# Altium PCB PCB_Proxxon_PWM_v1.1.PcbDoc
Units mm, origin at the board's own origin, x right, y up, seen from the top; angles counter-clockwise.
Board outline 55 x 30.2 mm, 2 copper layers (Top Layer, Bottom Layer); 29 components, 26 nets, 120 pads, 4 vias.
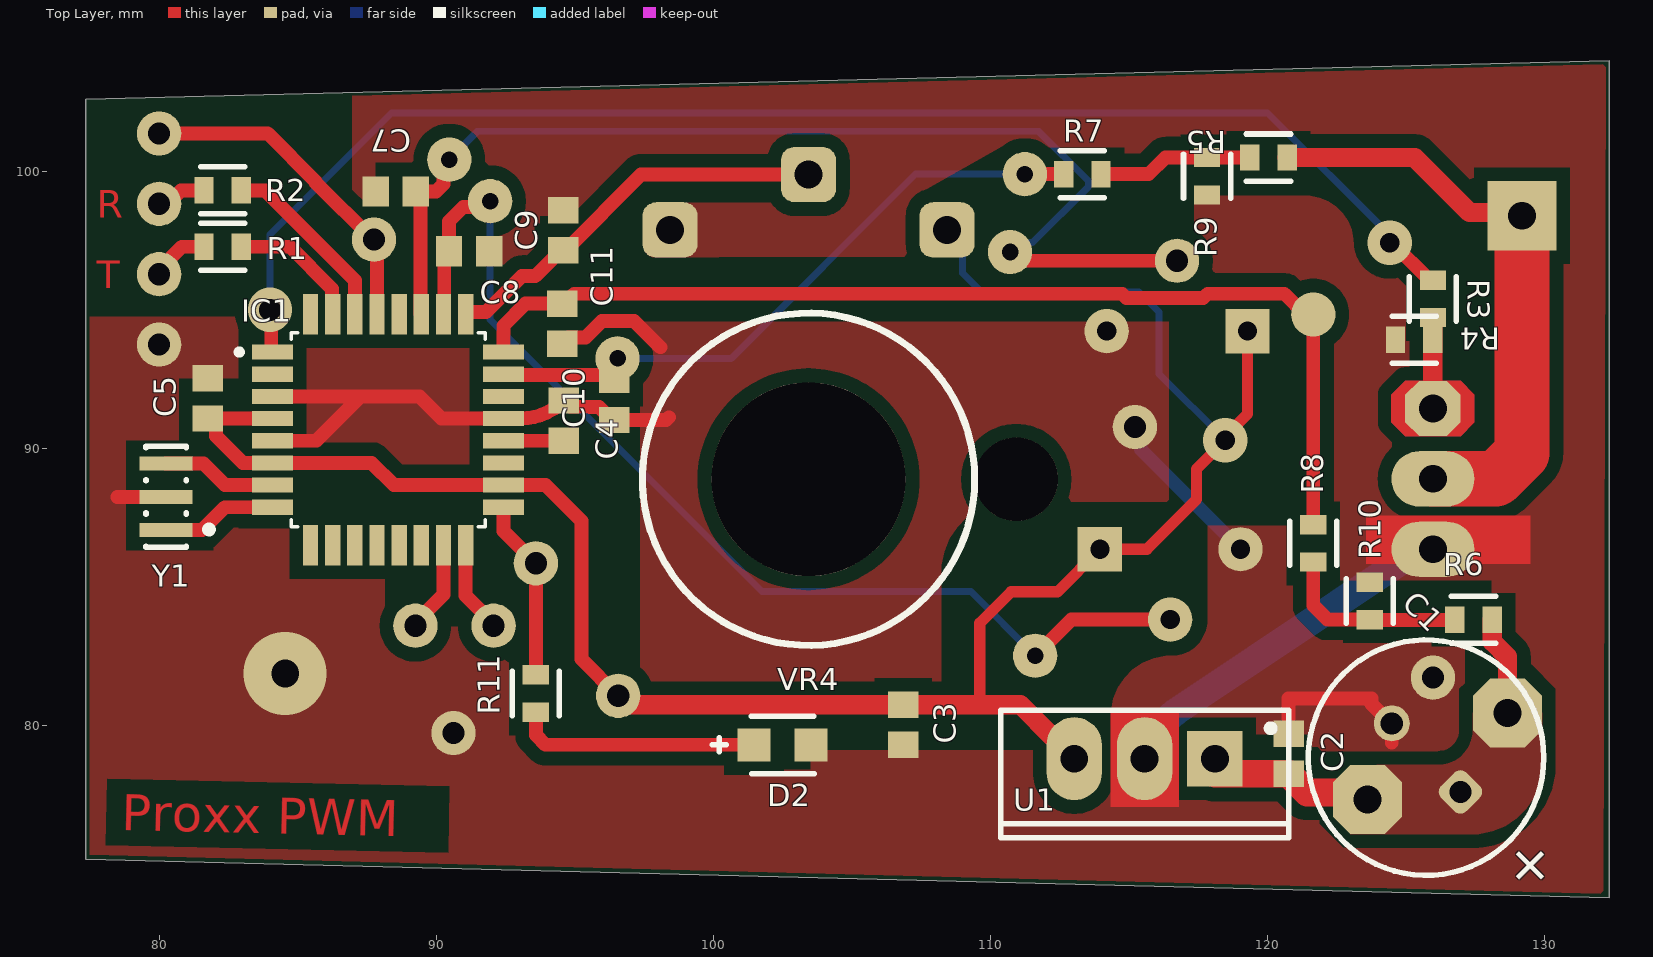
[diagram p0: Top Layer view]
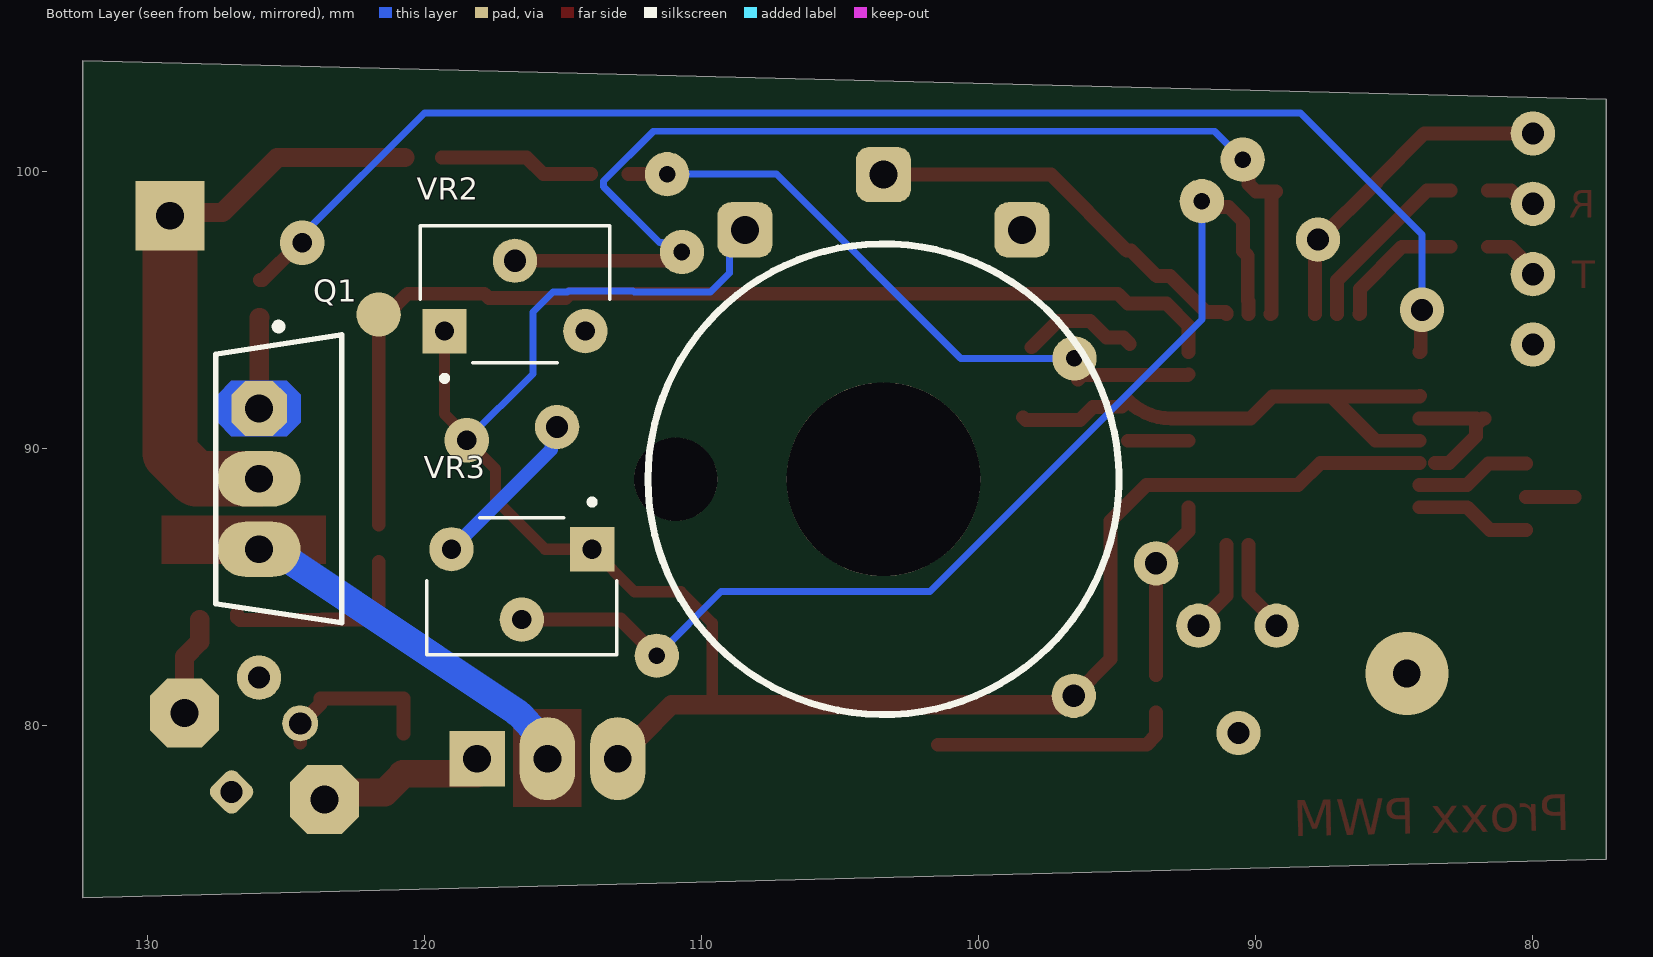
[diagram p1: Bottom Layer view, seen from below]
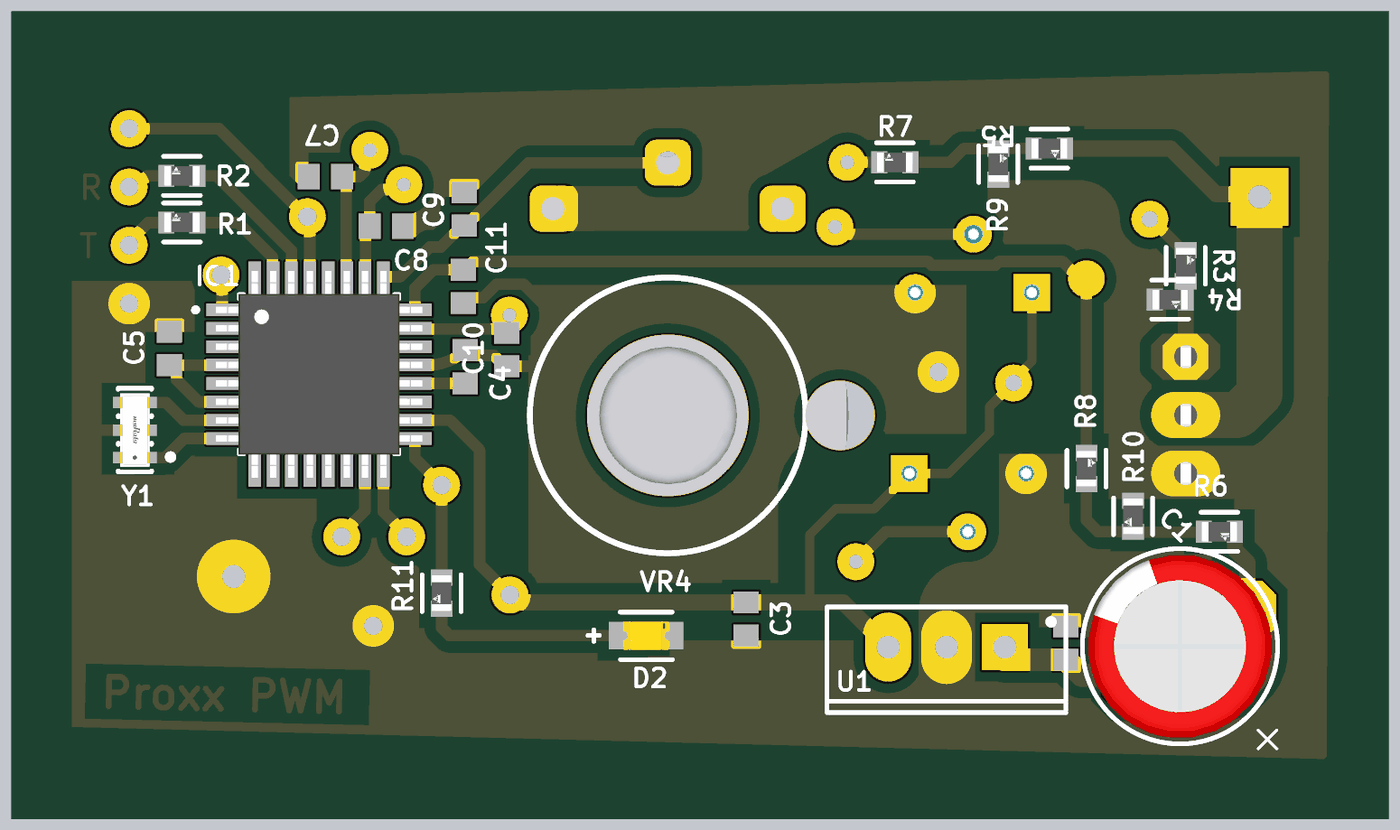
[diagram p2: 3D render of the assembled board from above, using the file's embedded part models]
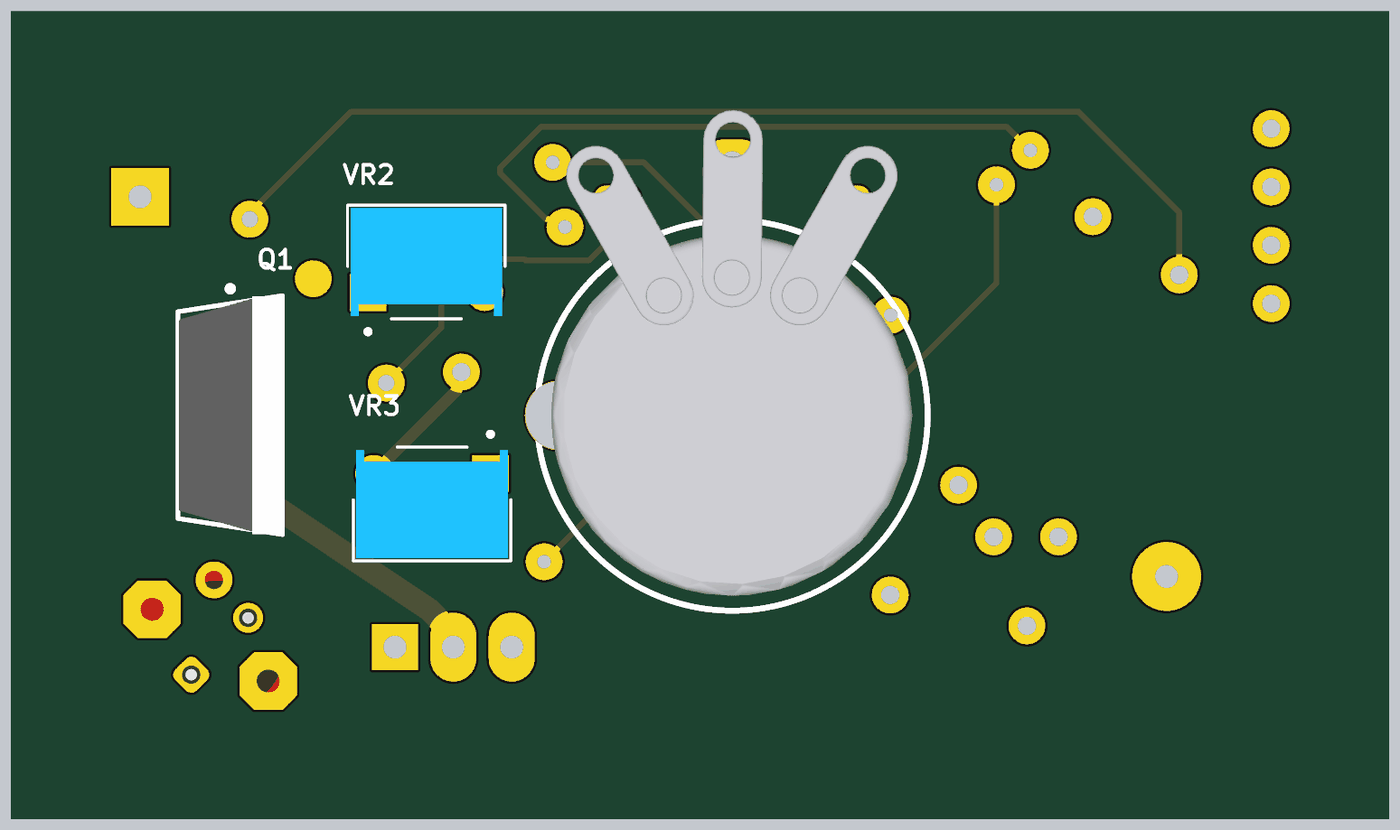
[diagram p3: 3D render of the assembled board from below, using the file's embedded part models]

## Layer stack, top to bottom
Top Solder: solder mask 0.0102, Solder Resist, Dk 3.5
Top Layer: signal copper 0.0356
Dielectric 1: dielectric 0.32, FR-4, Dk 4.8
Bottom Layer: signal copper 0.0356
Bottom Solder: solder mask 0.0102, Solder Resist, Dk 3.5

## Board outline
77.343,75.162 132.342,73.787 132.342,103.987 77.343,102.612

## Design rules (kind name [scope] priority, off if disabled: settings)
Clearance poly [IsRegion vs NOT IsText] p1: gap=0.5 ignorepadtopadclearanceinfootprint=FALSE
Clearance [All] p2: gap=0.3 ignorepadtopadclearanceinfootprint=FALSE except(0.1: Arc-SMDPad Track-SMDPad SMDPad-SMDPad Region-Text; 0.5: Track-Poly)
PlaneClearance [All] p1: clearance=0.6
PlaneConnect [All] p1: planeconnectstyle=Direct reliefexpansion=0.508 reliefentries=4 reliefconductorwidth=0.4 reliefairgap=0.254
PolygonConnect [All] p1: connectstyle=Direct reliefconductorwidth=0.5 reliefentries=4 polygonreliefangle="90 Angle" airgapwidth=0.254
RoutingVias [All] p1: holewidth=0.711 width=1.27 viastyle="Through Hole" minholewidth=0.711 minwidth=1.27 maxholewidth=0.711 maxwidth=1.27
SolderMaskExpansion [All] p1: expansion=0.102 istentingtop=FALSE
SupplyNets "Schematic Supply Nets_4" [InNet('+20V')] p1: voltage=0.000
SupplyNets "Schematic Supply Nets_2" [InNet('5V')] p2: voltage=0.000
SupplyNets "Schematic Supply Nets_1" [InNet('GND')] p3: voltage=0.000
SupplyNets "Schematic Supply Nets" [InNet('Vin')] p4: voltage=0.000
Width [All] p1: maxlimit=3 minlimit=0.15 preferedwidth=0.254
28 further rules are at their usual default settings.

## Components (designator, comment, footprint, x,y, rotation, side; value= is the part's Value field where it differs from the comment)
C1 "100uF" WCAP-ATLL_D8H11.5 125.738,78.837 r315 top
C2 "0.1uF" CAPC1608X92X38ML15T08 120.775,78.975 r270 top
C3 "0.1uF" CAPC1608X92X38ML15T08 106.857,80.025 r90 top
C4 "100nF" CAPC1608X92X38ML15T08 94.615,91.003 r90 top
C5 "1uF" CAPC1608X92X38ML15T08 81.75,91.803 r270 top
C7 "0.1uF" CAPC1608X92X38ML15T08 88.54,99.275 r0 top
C8 "0.1uF" CAPC1608X92X38ML15T08 91.19,97.125 r180 top
C9 "0.1uF" CAPC1608X92X38ML15T08 94.587,97.875 r270 top
C10 "0.1uF" CAPC1608X92X38ML15T08 96.425,91.753 r90 top
C11 "0.1uF" CAPC1608X92X38ML15T08 94.55,94.5 r90 top
D2 "SM0805YCL" FP-SM0805YCL-MFG 102.5,79.3 r0 top
IC1 "ATMEGA328PB-AU" QFP80P900X900X120-32N 88.265,90.678 r0 top
Q1 "IRLZ44" FP-PG-TO220-3-MFG 125.279,88.9 r180 bottom
R1 "1k" FP-MCT0603-MFG 82.296,97.282 r180 top
R2 "1k" FP-MCT0603-MFG 82.296,99.314 r180 top
R3 "100" FP-MCT0603-MFG 125.984,95.4 r90 top
R4 "10k" FP-MCT0603-MFG 125.309,93.925 r0 top
R5 "10k" FP-MCT0603-MFG 120.05,100.5 r0 top
R6 "10k" FP-MCT0603-MFG 127.45,83.82 r0 top
R7 "10k" FP-MCT0603-MFG 113.325,99.9 r180 top
R8 "10k" FP-MCT0603-MFG 121.666,86.574 r90 top
R9 "2k7" FP-MCT0603-MFG 117.83,99.825 r90 top
R10 "2k7" FP-MCT0603-MFG 123.698,84.495 r270 top
R11 "1k" FP-MCT0603-MFG 93.599,81.15 r270 top
U1 "L7805ABV" TO220 115.575,78.8 r180 top
VR2 "KI" TRIM_3362W-1-203LF#1 116.748,95.504 r0 bottom value=1k
VR3 "KP" TRIM_3362W-1-203LF#2 116.5,85.09 r180 bottom value=1k
VR4 "Speed" "Res-var - COMPACT" 103.443,88.887 r0 top value=92k
Y1 "CSTNE20M0VH3C000R0" FP-CSTNE20M0VH3C000R0-MFG 80.25,88.25 r90 top

## Footprints (in the part's own frame and the unit in brackets; to place one, negate y for a bottom-side part, rotate by r counter-clockwise, add the part's x,y. Pads: shape width x height; smd on the part's side, far side on the other; paste and mask are expansions set on the pad)
CAPC1608X92X38ML15T08 [mm] "Chip Capacitor, 2-Leads, Body 1.60x0.80mm, IPC Low Density"
  rect 0.95x1.1 smd: 1(-0.725,0) 2(0.725,0)
  body extent -0.87,-0.48 0.87,0.47, height 0.92
FP-CSTNE20M0VH3C000R0-MFG [mm]
  rect 0.5x1.9 smd paste+0 mask+0: 1(-1.2,0) 2(0,0) 3(1.2,0)
  silkscreen extent -1.83,-1.68 1.83,0.72, body extent -1.78,-1.05 1.78,1.05, height 0.25
FP-MCT0603-MFG [mm]
  rect 0.7x0.95 smd paste+0 mask+0: 1(-0.675,0) 2(0.675,0)
  silkscreen extent -0.8,-0.85 0.8,0.85, body extent -1.12,-0.58 1.12,0.58, height 0.25
FP-PG-TO220-3-MFG [mm]
  oct 2x2 hole 1 paste-2539.97 mask+0: 1(-0.705,2.54)
  oval 3x2 hole 1 paste-2539.97 mask+0: 2(-0.705,0) 3(-0.705,-2.54)
  Top Layer region: -1.705,3.54 -2.205,3.04 -2.205,2.04 -1.705,1.54 0.295,1.54 0.795,2.04 0.795,3.04 0.295,3.54
  Bottom Layer region: -1.705,3.54 -2.205,3.04 -2.205,2.04 -1.705,1.54 0.295,1.54 0.795,2.04 0.795,3.04 0.295,3.54
  silkscreen extent -2.27,-5.2 2.27,5.62, body extent -2.23,-5.18 2.22,5.18, height 19.15
FP-SM0805YCL-MFG [mil]
  rect 47x47 smd paste+0 mask+0: 1(-40.5,0) 2(40.5,0)
  silkscreen extent -100,-41 45,40, body extent -68,-33 68,33, height 10
QFP80P900X900X120-32N [mm]
  rect 1.47x0.55 smd paste+0 mask+0.102: 1(-4.17,2.8) 2(-4.17,2) 3(-4.17,1.2) 4(-4.17,0.4) 5(-4.17,-0.4) 6(-4.17,-1.2) 7(-4.17,-2) 8(-4.17,-2.8) 17(4.17,-2.8) 18(4.17,-2) 19(4.17,-1.2) 20(4.17,-0.4) 21(4.17,0.4) 22(4.17,1.2) 23(4.17,2) 24(4.17,2.8)
  rect 0.55x1.47 smd paste+0 mask+0.102: 9(-2.8,-4.17) 10(-2,-4.17) 11(-1.2,-4.17) 12(-0.4,-4.17) 13(0.4,-4.17) 14(1.2,-4.17) 15(2,-4.17) 16(2.8,-4.17) 25(2.8,4.17) 26(2,4.17) 27(1.2,4.17) 28(0.4,4.17) 29(-0.4,4.17) 30(-1.2,4.17) 31(-2,4.17) 32(-2.8,4.17)
  silkscreen extent -5.47,-3.5 3.5,3.5, body extent -4.5,-4.5 4.5,4.5, height 1.2
"Res-var - COMPACT" [mm]
  round 1.524 hole 7: 0(0,0)
  round 1.524 hole 3: 0(7.5,0)
  rrect50% 2x2 hole 1: 1(-5,9) 2(0,11) 3(5,9)
  silkscreen extent -6,-6 6,6, body extent -7.84,-7.85 7.86,13.29, height 14.9
TO220 [mm] "TO, Thru-Hole, Vertical, Heatsink Mounted; 3 In-Line Leads; Pitch 2.54 mm"
  rect 2x2 hole 1: 1(-2.54,0)
  oval 2x3 hole 1: 2(0,0) 3(2.54,0)
  silkscreen extent -5.2,-1.75 5.2,2.85, body extent -5.25,-1.8 5.25,2.9, height 19.7
TRIM_3362W-1-203LF#1 [mm]
  rect 1.6x1.6 hole 0.69: 1(2.54,1.27)
  round 1.6 hole 0.8: 2(0,-1.27)
  round 1.6 hole 0.69: 3(-2.54,1.27)
  silkscreen extent -3.42,-2.53 3.42,3.07, body extent -3.3,-2.41 3.3,2.29, height 6.99
TRIM_3362W-1-203LF#2 [mm]
  rect 1.6x1.6 hole 0.69: 1(2.54,1.27)
  round 1.6 hole 0.69: 2(0,-1.27) 3(-2.54,1.27)
  silkscreen extent -3.42,-2.53 3.42,3.07, body extent -3.3,-2.41 3.3,2.29, height 6.99
WCAP-ATLL_D8H11.5 [mm] "Aluminum Electrolytic Capacitors, 8x11.5mm"
  rrect50% 1.3x1.3 hole 0.8: 1(1.75,0)
  round 1.3 hole 0.8: 2(-1.75,0)
  silkscreen extent -4.25,-4.25 4.25,4.25, body extent -3.99,-4 4,4, height 11.81

## Part data
C1: library part CMP-03913-54007388-2, "Aluminium Electrolytic Capacitor-Leaded Rohs Compliant: Yes", Capacitance=270µF, Case/Package=Radial, Leakage Current=27µA, Max Operating Temperature=105°C, Min Operating Temperature=-55°C, Ripple Current=420mA, Tolerance=20%, Voltage Rating=10V, Diameter=8mm, Height - Seated (Max)=13.0048mm, Impedance=530mΩ, Lead Pitch=3.5052mm, Length=11.5mm, Life (Hours)=7000hours, Mount="Through Hole", Packaging="Tape & Box (TB)", Pitch=3.5mm, Polarity=Polar, RoHS=Compliant
C2 C3 C4 C5 C7 C8 C9 C10 C11: library part CMP-2006-01142-1, Manufacturer=Vitramon, Part Number=VJ0603Y102KXXAC
D2: library part CMP-35283-000007-1, "LED YELLOW CLEAR 0805 SMD", Case Code (Imperial)=0805, Case Code (Metric)=2012, Color=Yellow, Forward Current=2mA, Forward Voltage=1.9V, Lens Color=Colorless, Max Operating Temperature=80°C, Min Operating Temperature=-30°C, Package Quantity=4000, Case/Package=0805, Dominant Wavelength=592nm, Height=0.8mm, Illumination Color=Yellow, Lead Free="Lead Free", Length=2mm, Lens Transparency=Clear, Luminous Intensity=11.5mcd, Mount="Surface Mount", Packaging="Tape and Reel", Test Current=2mA, Viewing Angle=130°, Width=1.2mm
IC1: "AVR AVRВ® ATmega, Functional Safety (FuSa) Microcontroller IC 8-Bit 20MHz 32KB (16K x 16) FLASH 32-TQFP (7x7)", Package=None, Check_prices=https://www.snapeda.com/parts/ATMEGA328PBAU/Microchip+Technology/view-part/?ref=eda, MF="Microchip Technology", MP=ATMEGA328PBAU, SnapEDA_Link=https://www.snapeda.com/parts/ATMEGA328PBAU/Microchip+Technology/view-part/?ref=snap
Q1: library part CMP-32901-000488-1, "MOSFET N-CH 55V 47A TO220AB", Case/Package=TO-220, Continuous Drain Current (ID)=47A, Drain to Source Breakdown Voltage=55V, Drain to Source Resistance=35mR, Gate to Source Voltage (Vgs)=16V, Input Capacitance=1.7nF, Max Operating Temperature=175°C, Max Power Dissipation=110W, Min Operating Temperature=-55°C, Threshold Voltage=2V, Drain to Source Voltage (Vdss)=55V, Element Configuration=Single, Halogen Free="Halogen Free", Height=0.6inch, Lead Free="Lead Free", Length=0.414inch, Max Dual Supply Voltage=55V, Mount="Through Hole", Number of Pins=3, Packaging=Rail/Tube, Power Dissipation=110W, Rds On Max=22mR, REACH SVHC="No SVHC", RoHS Compliant=Yes, Turn-Off Delay Time=26ns, Turn-On Delay Time=11ns, Width=0.185inch
R1 R2 R3 R4 R5 R6 R7 R8 R9 R10 R11: library part CMP-02407-000603-1, "RES SMD 100 OHM 1% 1/8W 0603", Case Code (Imperial)=0603, Case Code (Metric)=1608, Max Operating Temperature=155°C, Min Operating Temperature=-55°C, Power Rating=125mW, Resistance=4.02kR, Tolerance=0.1%, Voltage Rating=75V, Case/Package=0603, Composition="Thin Film", Height=0.45mm, Length=1.55mm, Packaging="Tape and Reel", Weight=6.7E-05oz, Width=0.85mm
U1: library part CMP-0244-00485-1, "Positive Voltage Regulator, 5V, 3-Pin TO-220", ComponentLink1Description="Manufacturer URL", ComponentLink1URL=http://www.st.com, ComponentLink2Description=Datasheet, ComponentLink2URL=http://www.st.com/internet/com/TECHNICAL_RESOURCES/TECHNICAL_LITERATURE/DATASHEET/CD00000444.pdf, ComponentLink3Description="Package Specification", ComponentLink3URL=http://www.st.com/internet/com/TECHNICAL_RESOURCES/TECHNICAL_LITERATURE/PACKAGE_INFORMATION/CD00004649.pdf, DatasheetVersion=16/11/2011, PackageDescription="TO, Thru-Hole, Vertical, Heatsink Mounted; 3 In-Line Leads; Pitch 2.54 mm", PackageReference=TO220, PackageVersion=ver3.0
VR2 VR3: library part 3362W-1-203LF, "1/4 Sq, Thru-Hole, TRIMMER, 20 Kilohms, Cermet, Single Turn", Package="DIP-3 Bourns", Check_prices=https://www.snapeda.com/parts/3362W-1-203LF/Bourns/view-part/?ref=eda, MF=Bourns, MP=3362W-1-203LF, SnapEDA_Link=https://www.snapeda.com/parts/3362W-1-203LF/Bourns/view-part/?ref=snap
VR4: library part Res-var, "1/4 Sq, Thru-Hole, TRIMMER, 20 Kilohms, Cermet, Single Turn", Package="DIP-3 Bourns", Check_prices=https://www.snapeda.com/parts/3362W-1-203LF/Bourns/view-part/?ref=eda, MF=Bourns, MP=3362W-1-203LF, SnapEDA_Link=https://www.snapeda.com/parts/3362W-1-203LF/Bourns/view-part/?ref=snap
Y1: library part CMP-06057-000018-1, "CERAMIC RES 20.0000MHZ 15PF SMD", Capacitance=15pF, Case/Package=SMD/SMT, Frequency=20MHz, Frequency Stability=0.13%, Frequency Tolerance=0.07%, Max Operating Temperature=125°C, Min Operating Temperature=-40°C, Resistor Type=Ceramic, Impedance=40R, Mount="Surface Mount", Packaging="Cut Tape", RoHS Compliant=Yes

## Free pads (board coordinates)
  round 1.6 hole 0.8: 1(80,93.75) 1(80,96.29) 1(80,98.83) 1(80,101.37) 1(87.757,97.536) 1(89.25,83.6) 1(90.625,79.725) 1(92.075,83.6) 1(93.599,85.852) 1(96.573,81.069) 4(115.225,90.775) 4(125.984,81.725)
  round 7 hole 7: 1(103.443,88.887)
  round 3 hole 3: 1(110.943,88.887)
  round 1.6 hole 0.6: 4(111.627,82.516) 5(90.475,100.425) 5(91.95,98.925) 5(96.55,93.25) 5(111.252,99.9) 7(110.719,97.089)
  round 1.6 all layers, no hole: 6(121.666,94.834)
  oct 2.5x2.5 hole 1: 8(123.625,77.325) 8(128.675,80.45)
  rect 2.5x2.5 hole 1: 8(129.2,98.4)

## Via types
v1: diameter 1.6, hole 0.711, Top Layer to Bottom Layer, 2 vias
v2: diameter 3, hole 1, Top Layer to Bottom Layer, 1 vias
v3: diameter 1.6, hole 0.8, Top Layer to Bottom Layer, 1 vias

## Nets (pads, with @x,y where several pads share a name; then routed paths per layer and width w, separated by ;. In a path a pad name is that pad's centre, name@x,y a point inside that pad or via, vN(x,y) a via of type N, cw(c..) or ccw(c..) an arc to the next point about the centre after c; other vN are vias at no path point)
5V: C3.2 C5.2 IC1.4 IC1.6 IC1.18 pad.1@96.573,81.069 U1.3 VR2.1 VR3.1 VR4.3 | length 75.7
  Top Layer w0.4: 109.625,80.75 109.625,83.7 110.75,84.825 112.425,84.825 VR3.1 115.66,86.36 117.45,88.15 117.45,89.256 v1(118.491,90.297) ; v1@118.491,90.451 119.288,91.248 VR2.1
  Top Layer w0.5: C5.2 81.825,91.078 82.05,90.853 82.05,90.45 83.022,89.478 IC1.6@83.534,89.478 ; C5.2@82.05,91.078 IC1.4 ; IC1.6 87.672,89.478 88.472,88.678 IC1.18 93.947,88.678 95.25,87.375 95.25,82.392 pad.1@96.573,81.069
  Top Layer w0.7: pad.1@96.573,81.069 96.573,80.75 C3.2 109.625,80.75 111.085,80.75 112.286,79.549 112.434,79.549 113.035,78.948 U1.3
  Bottom Layer w0.25: VR4.3 109,97.33 109,96.325 109.686,95.639 112.441,95.639 112.486,95.684 114.809,95.684 114.843,95.65 115.368,95.65 116.1,94.918 116.1,92.688 v1(118.491,90.297)
+20V: C1.1 C2.2 pad.8@123.625,77.325 pad.8@128.675,80.45 R6.2 U1.1 | length 10.1
  Top Layer w0.7: R6.2 128.125,83.025 128.675,82.475 pad.8@128.675,80.45
  Top Layer w1: U1.1 118.115,78.25 C2.2 120.8,78.25 120.825,78.225 120.825,78.2 121.45,77.575 123.375,77.575 pad.8@123.625,77.325
BEMF: pad.8@129.2,98.4 Q1.2 R5.2 | length 21.5
  Top Layer w0.7: R5.2 125.325,100.5 127.31,98.515 129.085,98.515 pad.8@129.2,98.4
  Top Layer w2: Q1.2 128.175,88.9 ccw(c128.175,89.129) 128.337,88.967 129.2,89.83 pad.8@129.2,98.4
BEMF_PIN: C10.2 IC1.23 pad.5@96.55,93.25 pad.5@111.252,99.9 R7.2 | length 22.9
  Top Layer w0.5: IC1.23 92.46,92.653 96.25,92.653 C10.2 ; pad.5@111.252,99.9 R7.2
  Bottom Layer w0.25: pad.5@96.55,93.25 100.653,93.25 107.303,99.9 pad.5@111.252,99.9
GND: C1.2 C2.1 C3.1 C4.2 C5.1 C7.1 C8.1 C9.1 C10.1 C11.1 D2.2 IC1.3 IC1.5 IC1.21 pad.1@80,93.75 pad.1@90.625,79.725 pad.4@115.225,90.775 pad.4@125.984,81.725 Q1.3 R4.1 R9.1 R10.1 U1.2 VR2.3 VR3.3 VR4.1 Y1.2 | length 50.6
  Top Layer w0.5: 78.5,88.25 Y1.2 ; IC1.3@84.07,91.903 IC1.3 87.275,91.878 ; IC1.5 85.675,90.278 87.275,91.878 ; C11.1 94.775,94 95.391,94 95.991,94.6 97.15,94.6 98.1,93.65 ; 98.4,91.125 98.303,91.028 C10.1 96.35,91.028 95.878,91.5 95.55,91.5 95.547,91.503 94.84,91.503 C4.2 cw(c93.046,93.297) 93.046,91.078 IC1.21 90.197,91.078 89.397,91.878 87.275,91.878 ; C2.1 120.775,80.975 123.767,80.975 123.767,80.775 124.467,80.075 C1.2 ; 124.5,79.375 C1.2@124.5,80.075
  Top Layer w1: VR2.3@114.208,94.07 VR2.3
  Bottom Layer w0.5: pad.4@115.225,90.775 115.435,90.565 115.435,89.965 VR3.3
  Bottom Layer w1: U1.2 115.575,79.3 116.524,80.339 cw(c117.115,79.8) 116.67,80.465 125.484,86.36 Q1.3
  other v2: 84.55,81.875
I_PIN: C7.2 IC1.27 pad.5@90.475,100.425 pad.7 VR2.2 | length 40.3
  Top Layer w0.5: IC1.27 89.44,94.873 89.44,99.1 C7.2 90,99.275 90.265,99.54 90.265,100.215 pad.5@90.475,100.425 ; pad.7@111.274,96.774 VR2.2
  Bottom Layer w0.25: pad.5@90.475,100.425 91.5,101.45 111.75,101.45 113.546,99.654 113.546,99.446 111.535,97.435 111.431,97.435 111.085,97.089 pad.7
MISO: IC1.16 pad.1@92.075,83.6 | length 3.4
  Top Layer w0.5: IC1.16 91.065,84.694 92.075,83.684 pad.1@92.075,83.566
MOSI: IC1.15 pad.1@89.25,83.6 | length 3.3
  Top Layer w0.5: pad.1@89.25,83.6 89.25,83.708 90.265,84.723 IC1.15
NetC4_1: C4.1 IC1.20 | length 2.2
  Top Layer w0.5: IC1.20 C4.1
NetD2_1: D2.1 R11.2 | length 8.8
  Top Layer w0.5: R11.2 93.599,79.651 93.95,79.3 D2.1
NetIC1_30: IC1.30 R2.1 | length 6.7
  Top Layer w0.5: R2.1 83.82,99.314 87.065,96.069 IC1.30
NetIC1_31: IC1.31 R1.1 | length 4.8
  Top Layer w0.5: R1.1 84.721,97.282 86.24,95.763 86.24,94.873 IC1.31
NetQ1_1: Q1.1 R3.1 R4.2 | length 3.3
  Top Layer w0.7: R3.1@125.95,94.725 R3.1 Q1.1
NetR5_1: R5.1 R7.1 R9.2 | length 5.6
  Top Layer w0.5: R7.1 115.725,99.9 116.325,100.5 R9.2 ; R9.2@117.836,100.506 119.369,100.506 R5.1
NetR6_1: R6.1 R8.1 R10.2 | length 7.1
  Top Layer w0.5: R8.1 121.666,84.328 122.174,83.82 R10.2 123.718,83.8 126.675,83.8 126.775,83.9 R6.1@126.775,84.025
P_PIN: C8.2 IC1.26 pad.4@111.627,82.516 pad.5@91.95,98.925 VR3.2 | length 39.7
  Top Layer w0.5: IC1.26 90.265,95.308 90.29,95.333 90.29,96.95 C8.2 90.465,98.2 90.979,98.715 91.74,98.715 pad.5@91.95,98.925 ; pad.4@111.534,82.423 112.936,83.825 116.495,83.825 VR3.2
  Bottom Layer w0.25: pad.5@91.95,98.925 91.95,94.652 101.765,84.837 109.305,84.837 pad.4@111.627,82.516
PWM_PIN: IC1.1 R3.2 | length 50.7
  Top Layer w0.5: v3(84,95) 84.048,94.952 84.048,93.503 84.073,93.478 IC1.1 ; v1(124.425,97.425) 124.509,97.425 125.859,96.075 R3.2@125.95,96.075
  Bottom Layer w0.25: v3(84,95) 84,97.716 88.392,102.108 120.015,102.108 124.425,97.698 v1(124.425,97.425)
RESET: IC1.29 pad.1@80,101.37 pad.1@87.757,97.536 | length 12.1
  Top Layer w0.5: pad.1@80,101.37 83.923,101.37 85.651,99.642 85.651,99.604 87.719,97.536 87.757,97.536 87.865,97.428 IC1.29
RX: pad.1@80,98.83 R2.2 | length 1.8
  Top Layer w0.5: pad.1@80,98.83 80.298,98.83 80.782,99.314 R2.2
SCK: IC1.17 pad.1@93.599,85.852 R11.1 | length 6.5
  Top Layer w0.5: IC1.17 92.435,87.016 93.599,85.852 R11.1
SPEED_PIN: C9.2 IC1.25 VR4.2 | length 14.5
  Top Layer w0.5: IC1.25 91.065,94.897 91.09,94.922 91.797,94.922 93.093,96.218 93.58,96.218 94.512,97.15 94.663,97.15 97.399,99.887 VR4.2
TX: pad.1@80,96.29 R1.2 | length 2.1
  Top Layer w0.5: pad.1@80,96.29 80,96.451 80.831,97.282 R1.2
Vin: 
VMOT_PIN: C11.2 IC1.24 pad.6 R8.2 | length 38.7
  Top Layer w0.5: IC1.24 92.435,94.429 93.231,95.225 94.625,95.225 94.984,95.584 114.767,95.584 114.927,95.424 117.693,95.424 117.853,95.584 120.618,95.584 121.368,94.834 pad.6 R8.2
XTAL1: IC1.7 Y1.3 | length 4.2
  Top Layer w0.5: Y1.3 81.6,89.45 82.372,88.678 IC1.7
XTAL2: IC1.8 Y1.1 | length 4.2
  Top Layer w0.5: Y1.1 81.55,87.05 82.378,87.878 IC1.8
pads on no net: IC1.2 IC1.9 IC1.10 IC1.11 IC1.12 IC1.13 IC1.14 IC1.19 IC1.22 IC1.28 IC1.32 VR4.0

## Polygon pours and split planes (outlines as drawn)
GND on Top Layer "GND_poly" (solid, remove dead copper, pour order 9): 77.5,102.5 132.225,103.875 132.125,73.925 77.5,75.325
+20V on Top Layer "12" (solid, pour order 8): 123,78.575 126.175,78.575 ccw(c126.175,79.825) 127.425,79.825 127.425,80.45 129.925,80.45 129.925,78.615 cw(c127.385,78.615) 127.385,76.075 123,76.075

## Other copper
Top Layer:
  rectangle net GND: 114.35,77.05 116.815,80.6
  rectangle net GND: 123.575,85.825 129.5,87.575
  pour cut-out: 97.5,97.275 ccw(c97.88,97.275) 97.88,96.895 100.24,96.895 cw(c99.68,96.895) 99.68,96.335 95.637,96.335 95.637,97.287 cw(c97.975,97.287) 97.975,99.625 99.025,99.625 99.025,97.275
  pour cut-out: 123.125,97.379 ccw(c121.379,97.379) 121.379,99.125 120.975,99.125 cw(c121.25,99.125) 121.25,99.4 123.6,99.4 123.6,97.854 cw(c123.125,97.854)
  pour cut-out: 114.352,80.019 114.352,80.326 cw(c116.546,80.326) 116.546,82.52 ccw(c116.546,83.824) 117.85,83.824 117.85,88.075 110.781,88.075 ccw(c110.781,85.535) 108.241,85.535 108.241,80.75 ccw(c108.879,80.75) 108.879,80.111 114.298,80.111
  pour cut-out: 82.782,95.19 82.782,94.718 ccw(c83.75,94.718) 83.75,93.75 84,93.75 ccw(c84,94.75) 85,94.75 ccw(c84.56,94.75) 84.56,95.19
  pour cut-out: 122.75,79.075 121.975,79.075 121.825,79.225 121.625,79.225 121.625,78.95 122.2,78.375 122.75,78.925
  pour cut-out: 107.235,99.095 110.436,100.913 117.375,99.475 117.35,96.925 107.325,97.075
  pour cut-out: 99.025,98.875 102.175,98.875 102.175,99.424 99.025,99.424
  pour cut-out: 95.175,98.4 93.738,98.4 93.738,97.925 95.15,97.925 95.15,98.425
  pour cut-out: 91.175,98.175 91.175,96.3 92.3,96.3 92.3,98.175
  pour cut-out: 88.49,100.325 87.8,100.325 87.8,98.498 88.49,98.498
  pour cut-out: 116.449,87.211 116.449,95.209 120.993,95.209 120.993,87.211
  pour cut-out: 127.949,90.348 125.45,90.348 125.45,97.425 124.509,97.425 124.509,99.975 124.925,99.975 127.65,97.664 127.949,96.85
  pour cut-out: 127.125,81.225 127.125,83.25 127.675,83.25 127.675,81.225
  pour cut-out: 114.65,99.125 124.75,99.125 124.75,99.85 114.65,99.85
  pour cut-out: 102.375,79.1 102.375,78.403 103.529,78.403 103.529,79.3 102.375,79.3 102.375,79.1
  pour cut-out: 102.368,80.024 111.734,80.024 111.734,79.1 102.375,79.1
  pour cut-out: 80.7,91.55 80.7,92.525 82.86,92.525 82.86,91.55
  pour cut-out: 95,95.75 95,94.575 100.24,94.575 100.24,95.75
  pour cut-out: 78.8,90.303 78.8,86.303 81.964,86.303 81.964,90.303
  pour cut-out: 86.972,99.1 86.972,102.75 80,102.75 80,99.1
  pour cut-out: 85.5,94.75 85.5,97.25 77.25,97.25 77.25,94.75
  pour cut-out: 82.9,90.825 83.375,90.825 83.375,90.054 82.9,90.054
  pour cut-out: 92.875,94.6 97.375,94.6 97.375,80.375 92.875,80.375
  pour cut-out: 93.3,92.375 96.025,92.375 96.025,90.625 93.3,90.625
  pour cut-out: 121.625,78.725 121.625,79.675 119.425,79.675 119.425,78.725
  pour cut-out: 122.925,77.675 122.925,78.375 121.475,78.375 121.475,77.675
  pour cut-out: 122.441,85.249 122.125,85.249 122.125,84.125 128.1,84.125 128.1,85.249
  pour cut-out: 88.15,83.557 88.15,87.075 93.25,87.075 93.25,83.557
  pour cut-out: 100.22,96.918 117.6,96.918 117.6,95.35 118.3,95.35 118.3,94.575 100.24,94.575 100.24,96.895
  pour cut-out: 95.2,92.225 96.1,92.325 96.1,90.675 95.05,90.925 95.175,92.225
  text "R" at 77.742,98.33 h1
  text "T" at 77.742,95.79 h1
  text "Proxx PWM" at 78.631,76.219 h1.3 r358.72

## Silkscreen, mask and mechanical layers (free items; w line width, h text height)
Mechanical 3:
  lines w0.254: 75,75.15 77.225,75.15 77.225,102.625 75,102.625 ; 77.344,72.801 77.344,75.035 132.228,73.667 132.345,73.779 ; 77.35,104.95 77.35,102.743 132.229,104.115 ; 132.35,71.425 132.35,73.775 ; 132.35,104 132.35,106.35 ; 132.47,73.779 132.475,104 134.7,104

## Text inside footprints (layer, text, board x,y; h text height)
C1: Top Overlay "+" at 128.425,75.09 h1.5 r315